# EAGLE board brick_i2c_lcd (EAGLE 7.4.0)
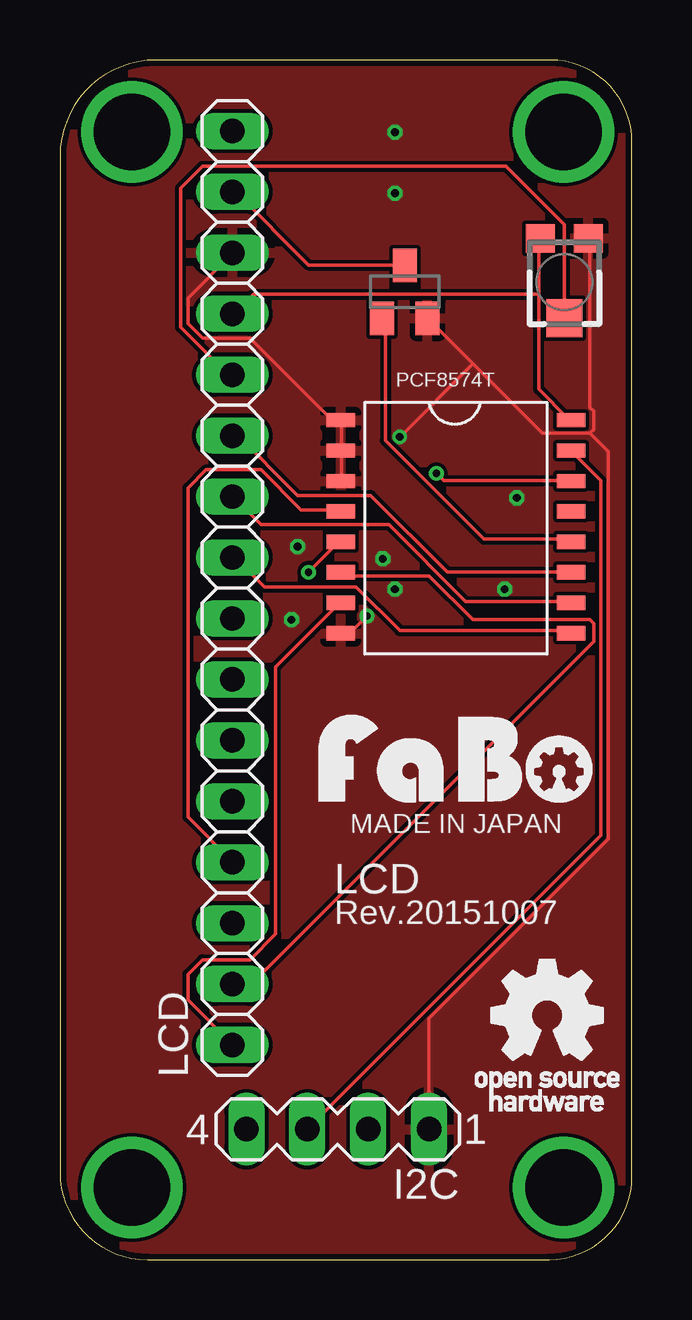
[diagram p0: board, top side]
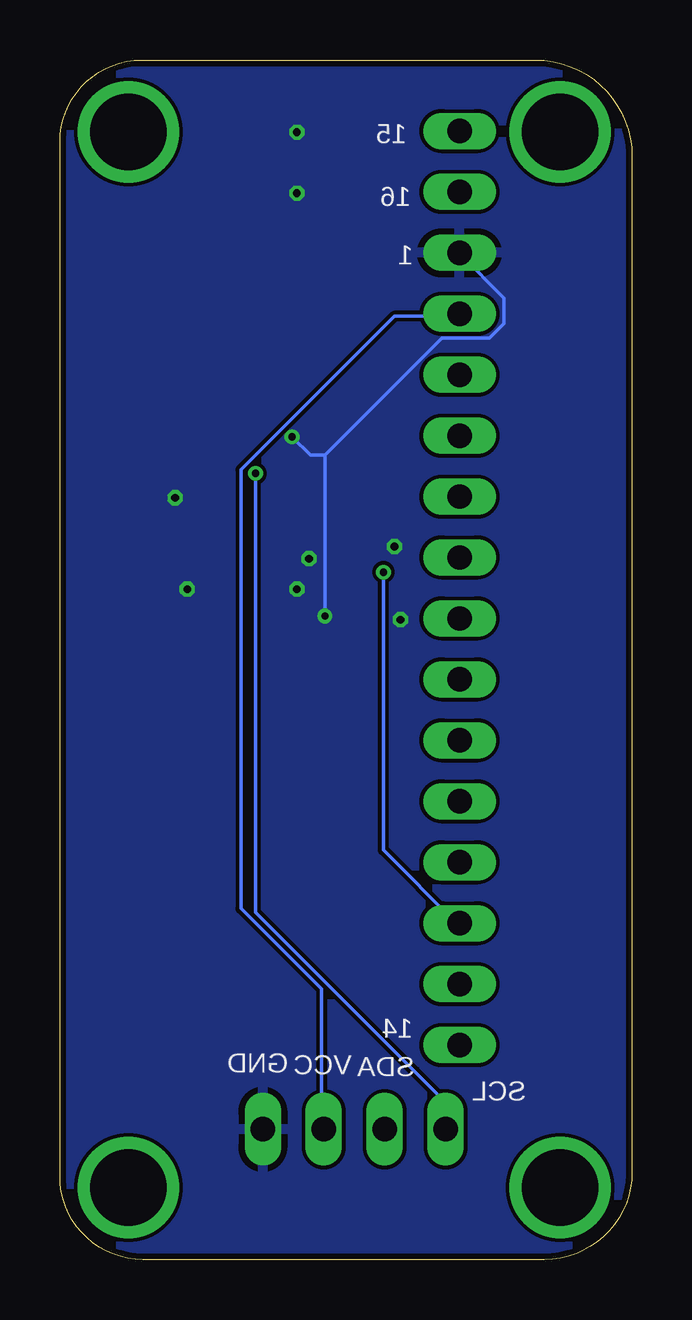
[diagram p1: board, bottom side, seen from below]

Size 23.85 x 50 mm. Coordinates in mm from the lower left corner, seen from the top.
Outline: 3.65,0 20.4,0 arc90 23.85,3.45 23.85,46.59 arc90 20.44,50 4.01,50 arc90 0,45.99 0,3.65 arc90 3.65,0
Copper layers (1*16): Top 0.035mm / dielectric 1.5mm / Bottom 0.035mm
Design rules "Elecrow_2-layer_eagle_rule": minimum track width 6mil, minimum drill 12mil, track to track 6mil, track to pad 6mil, pad to pad 6mil, via to via 6mil, smd to smd 0mil, copper to edge 10mil, drill to drill 10mil, minimum pad ring 10mil, minimum via ring 6mil, stop-mask expansion 2mil, vias tented up to drill 100mil, thermal gap 10mil

## Footprints (pad centres in the part's own frame; a part is rotated, then mirrored left to right if it is on the bottom)
MA04-1 = drill 1.016 long: 1 -3.81,0; 2 -1.27,0; 3 1.27,0; 4 3.81,0
1X16 = drill 1.016 long: 1 -19.05,0; 2 -16.51,0; 3 -13.97,0; 4 -11.43,0; 5 -8.89,0; 6 -6.35,0; 7 -3.81,0; 8 -1.27,0; 9 1.27,0; 10 3.81,0; 11 6.35,0; 12 8.89,0; 13 11.43,0; 14 13.97,0; 15 16.51,0; 16 19.05,0
SOT23 = smd 1 x 1.4: 1 -0.95,-1.1; 2 0.95,-1.1; 3 0,1.1
TC33X = smd 1.2 x 1.2: 1 -1,-1.825; 3 1,-1.825 | smd 1.5 x 1.6: 2 0,1.5
SO16 = smd 1.2 x 0.6: A0 -4.8,4.51; A1 -4.8,3.24; A2 -4.8,1.97; INT 4.8,0.7; P0 -4.8,0.7; P1 -4.8,-0.57; P2 -4.8,-1.84; P3 -4.8,-3.11; P4 4.8,-4.38; P5 4.8,-3.11; P6 4.8,-1.84; P7 4.8,-0.57; SCL 4.8,1.97; SDA 4.8,3.24; VDD 4.8,4.51; VSS -4.8,-4.38

## Placement (x,y rotation side)
E$1  [LOGO_FABO_M]  16.51,19.05 0 top
E$2  [LOGO_OSHW_T_M]  20.32,10.16 0 top
I2C  [MA04-1]  11.58,5.44 180 top
LCD  [1X16]  7.19,27.99 90 top
T1  .  [SOT23]  14.38,40.34 0 top
TX33C  [TC33X]  21.03,40.74 180 top
U$1  IC-PCF8574T  [SO16]  16.51,30.48 0 top

## Library data of the parts
E$1 = FaBo
E$2 = FaBo-etc
I2C = con-lstb; OC_FARNELL: unknown; OC_NEWARK: unknown
LCD = pinhead
T1 = transistor
TX33C = adafruit
U$1 = gclue

## Nets
DB0: LCD.8
DB1: LCD.7
DB2: LCD.6
DB3: LCD.5
DB4: LCD.4 U$1.P0
DB5: LCD.3 U$1.P1
DB6: LCD.2 U$1.P2
DB7: LCD.1 U$1.P3
E: LCD.9 U$1.P4
GND: I2C.1 LCD.14 T1.2 TX33C.1 U$1.A0 U$1.A1 U$1.A2 U$1.VSS
LEVEL: LCD.12 TX33C.2
LIGHT: LCD.16
LIGHT-: LCD.15 T1.3
N$6: T1.1 U$1.P7
R/W: LCD.10 U$1.P5
RS: LCD.11 U$1.P6
SCL: I2C.4 U$1.SCL
SDA: I2C.3 U$1.SDA
VCC: I2C.2 LCD.13 TX33C.3 U$1.VDD

## Tracks (layer width: path | path; a pad name or v marks a point on that pad's centre or on a via)
DB4
  Top 0.152: U$1.P0 11.58,31.24 10.06,31.24 8.38,32.92 6.1,32.92 5.33,32.16 5.33,18.44 7.16,16.61 LCD.4
DB5  (via drill 0.3)
  Top 0.152: v10.36,28.65 11.58,29.87 U$1.P1
  Bottom 0.152: v10.36,28.65 10.36,17.07 7.32,14.02 LCD.3
DB6
  Top 0.152: U$1.P2 11.73,28.5 15.39,28.5 17.22,26.67 22.1,26.67 22.25,26.52 22.25,25.76 8.08,11.58 7.32,11.58 LCD.2
DB7
  Top 0.152: U$1.P3 11.58,27.28 8.99,24.69 8.99,13.56 7.92,12.5 5.94,12.5 5.33,11.89 5.33,10.82 7.16,8.99 LCD.1
E
  Top 0.152: U$1.P4 21.18,26.21 14.17,26.21 12.34,28.04 8.53,28.04 7.32,29.26 LCD.9
GND  (via drill 0.3, 0.32)
  Top 0.152: U$1.A2 11.73,32.46 11.73,33.68 U$1.A1 11.73,33.83 11.73,34.9 U$1.A0 11.58,35.05 11.28,35.05 7.92,38.41 5.94,38.41 5.33,39.01 5.33,40.08 7.16,41.91 LCD.14 | v12.8,26.82 12.19,26.21 11.73,26.21 U$1.VSS | 22.1,34.44 22.25,34.59 22.25,35.36 22.1,35.51 22.1,42.52 TX33C.1 | 22.1,34.44 20.12,34.44 17.22,37.34 | 17.22,37.34 15.39,39.17 T1.2 | I2C.1 15.39,10.06 22.86,17.53 22.86,33.68 22.1,34.44 | 17.22,37.34 v14.17,34.29
  Bottom 0.152: 12.8,33.53 v12.8,26.82 | 12.8,33.53 7.92,38.41 5.94,38.41 5.33,39.01 5.33,40.08 7.16,41.91 LCD.14 | 12.8,33.53 13.41,33.53 v14.17,34.29
  other vias: 13.97,44.45 13.97,46.99 19.05,31.75 13.97,27.94 9.91,29.72 9.65,26.67 13.46,29.21 18.54,27.94
  pour Top: 0,0 24.13,0 24.13,50.8 0,50.8
  pour Bottom: 0,0 24.13,0 24.13,50.8 0,50.8
LEVEL
  Top 0.152: TX33C.2 21.03,43.13 18.59,45.57 5.94,45.57 5.03,44.65 5.03,38.86 7.01,36.88 LCD.12
LIGHT-
  Top 0.152: T1.3 14.33,41.45 10.36,41.45 7.32,44.5 LCD.15
N$1  (via drill 3.2)
  other vias: 21,3
N$3  (via drill 3.2)
  other vias: 21,47
N$4  (via drill 3.2)
  other vias: 3,47
N$5  (via drill 3.2)
  other vias: 3,3
N$6
  Top 0.152: U$1.P7 21.18,30.02 17.68,30.02 13.56,34.14 13.56,39.17 T1.1
R/W
  Top 0.152: U$1.P5 21.18,27.43 16.92,27.43 13.72,30.63 8.38,30.63 7.32,31.7 LCD.10
RS
  Top 0.152: U$1.P6 21.18,28.65 16.15,28.65 12.95,31.85 9.91,31.85 7.32,34.44 LCD.11
SCL  (via drill 0.3)
  Top 0.152: v15.7,32.77 16,32.46 21.18,32.46 U$1.SCL
  Bottom 0.152: v15.7,32.77 15.7,14.48 7.77,6.55 I2C.4
SDA
  Top 0.152: I2C.3 22.55,17.68 22.55,32.46 21.34,33.68 U$1.SDA
VCC
  Top 0.152: 19.96,40.23 19.96,36.27 21.18,35.05 U$1.VDD | 19.96,40.23 19.96,42.52 TX33C.3 | 19.96,40.23 8.08,40.23 7.32,39.47 LCD.13
  Bottom 0.152: I2C.2 12.95,5.49 12.95,11.28 16.31,14.63 16.31,32.92 9.91,39.32 7.32,39.32 LCD.13

## Text on the board
tPlace: MADE IN JAPAN | LCD | Rev.20151007
bPlace: 15 | 16 | 1 | 14 | SDA | VCC | GND | SCL